# EAGLE board kickerv2 (EAGLE 9.6.2)
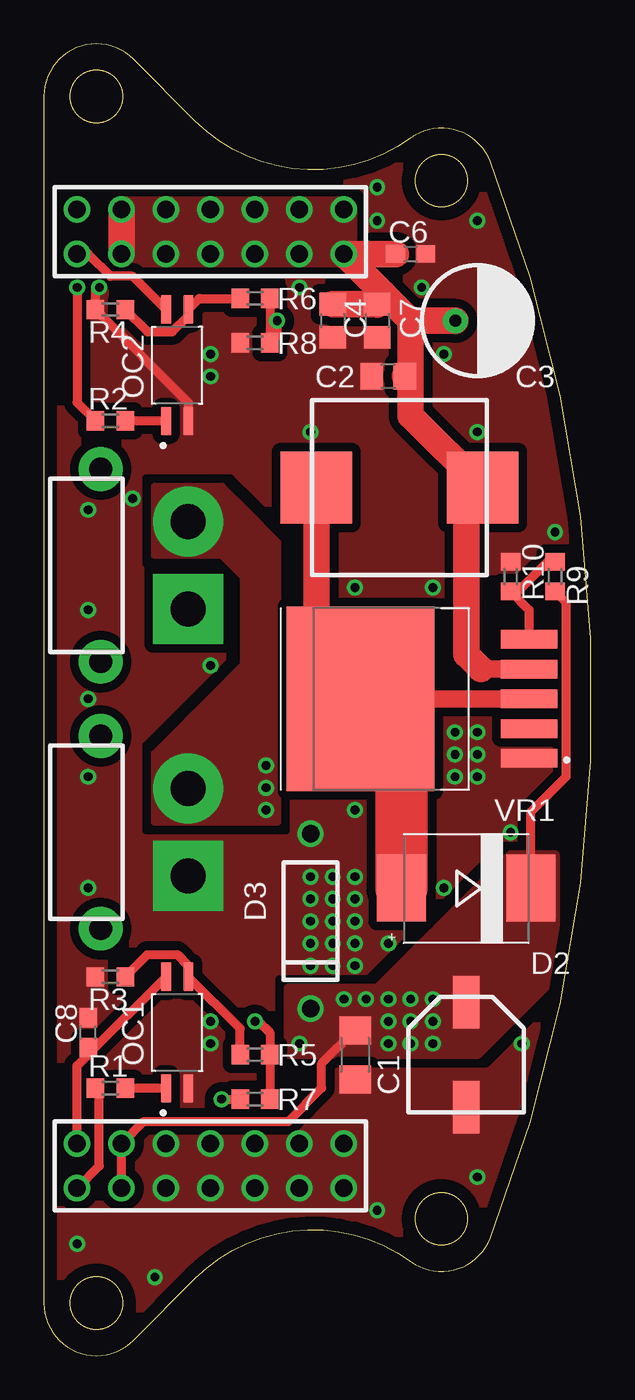
[diagram p0: board, top side]
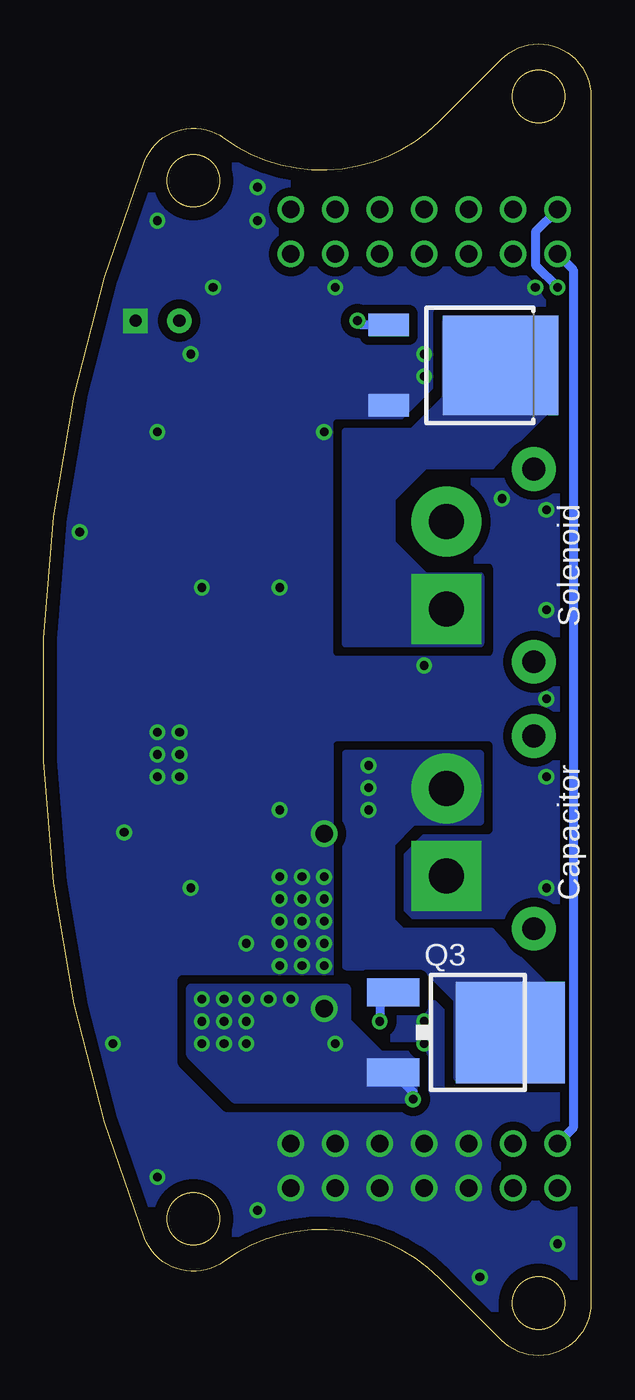
[diagram p1: board, bottom side, seen from below]

Size 31.26 x 74.91 mm. Coordinates in mm from the lower left corner, seen from the top.
Outline: 25.5,68.19 arc104 20.95,69.53
Outline: 20.95,69.53 arc-81 8.66,70.5
Outline: 5.12,74.03 arc135 0,71.91
Outline: 8.66,4.41 arc-81 20.95,5.39
Outline: 20.95,5.39 arc104 25.5,6.72
Outline: 8.66,4.41 5.12,0.88 arc-135 0,3 0,71.91
Outline: 8.66,4.41 arc-81 20.95,5.39
Outline: 20.95,5.39 arc104 25.5,6.72
Outline: 25.5,6.72 arc43 25.5,68.19
Outline: 25.5,68.19 arc104 20.95,69.53
Outline: 20.95,69.53 arc-81 8.66,70.5
Outline: 8.66,70.5 5.12,74.03
Outline: 5.12,74.03 arc135 0,71.91
Outline: circle at 22.71,7.82 radius 1.5
Outline: circle at 3,71.91 radius 1.5
Outline: circle at 22.71,67.1 radius 1.5
Outline: circle at 3,3 radius 1.5
Copper layers (1*16): Top 0.035mm / dielectric 1.5mm / Bottom 0.035mm
Design rules "default *": minimum track width 6mil, minimum drill 0.3mm, track to track 6mil, track to pad 6mil, pad to pad 6mil, via to via 6mil, smd to smd 6mil, copper to edge 30mil, drill to drill 6mil, minimum pad ring 10mil, minimum via ring 8mil, stop-mask expansion 4mil, vias tented up to drill 0mil, thermal gap 10mil

## Footprints (pad centres in the part's own frame; a part is rotated, then mirrored left to right if it is on the bottom)
C1206 = smd 1.6 x 1.8: 1 -1.4,0; 2 1.4,0
C0805 = smd 1.3 x 1.5: 1 -0.95,0; 2 0.95,0
MH5 = drill 0.7 pad 1.4: + 1.25,0 | drill 0.7 pad 1.4 square: - -1.25,0
VZ1H470ME077000CE0 = smd 1.5 x 3: + 0,3; - 0,-3
C0603 = smd 1.1 x 1: 1 -0.85,0; 2 0.85,0
DIOSC6959X240 = smd 2.8 x 3.8: A 3.7,0; C -3.7,0
UF2010 = drill 1: A 5,0; C -5,0
MDE1040-470M = smd 4.1 x 4.1: P$1 4.75,0; P$2 -4.75,0
SOIC127P700X230-4N = smd 1.64 x 0.59: A -3.185,0.635; C -3.185,-0.635; COL 3.185,0.635; EMI 3.185,-0.635
TO230P1040X230-3N = smd 5.67 x 6.59: D 0,1.2 | smd 1.28 x 2.3: G -2.3,-5.2; S 2.3,-5.2
DPACK = smd 5.8 x 6.2: D 0,2.38 | smd 1.6 x 3: G -2.28,-4.3; S 2.28,-4.3
R0603 = smd 1 x 1.1: 1 -0.85,0; 2 0.85,0
2*7 = drill 1: 1 -1.27,7.62; 2 1.27,7.62; 3 -1.27,5.08; 4 1.27,5.08; 5 -1.27,2.54; 6 1.27,2.54; 7 -1.27,0; 8 1.27,0; 9 -1.27,-2.54; 10 1.27,-2.54; 11 -1.27,-5.08; 12 1.27,-5.08; 13 -1.27,-7.62; 14 1.27,-7.62
DPAK170P1435X465-6N = smd 3.21 x 1.05: 1 -6.13,3.4; 2 -6.13,1.7; 3 -6.13,0; 4 -6.13,-1.7; 5 -6.13,-3.4 | smd 8.46 x 10.53: 6 3.5,0
XT30PW-F = drill 2 pad 4: + 0,-2.5 | drill 2 pad 4 square: - 0,2.5 | drill 1.3 pad 2.5: P$3 5,5.5; P$4 5,-5.5

## Placement (x,y rotation side)
C1  1uf  [C1206]  17.78,17.19 270 top
C2  22uf  [C0805]  19.68,55.92 180 top
C3  100uf  [MH5]  24.77,59.1 180 top
C4  22uf  [C0805]  16.51,59.1 270 top
C5  47uf  [VZ1H470ME077000CE0]  24.13,17.19 0 top
C6  0.1uf  [C0603]  20.95,62.91 0 top
C7  22uf  [C0805]  19.05,59.1 270 top
C8  0.1uf  [C0603]  2.54,18.46 90 top
D2  SS1060C  [DIOSC6959X240]  24.13,26.71 180 top
D3  UF2010  [UF2010]  15.24,24.81 90 top
L1  47uh  [MDE1040-470M]  20.32,49.57 0 top
OC1  TL293(GB)  [SOIC127P700X230-4N]  7.62,18.46 90 top
OC2  TL293(GB)  [SOIC127P700X230-4N]  7.62,56.56 90 top
Q2  NP52N06SLG  [TO230P1040X230-3N]  6.35,56.56 270 bottom
Q3  TJ60S04M3L  [DPACK]  6.99,18.46 270 bottom
R1  100  [R0603]  3.81,15.28 180 top
R2  100  [R0603]  3.81,53.38 0 top
R3  1k  [R0603]  3.81,21.63 0 top
R4  1k  [R0603]  3.81,59.73 180 top
R5  100  [R0603]  12.06,17.19 180 top
R6  100  [R0603]  12.06,60.37 180 top
R7  10k  [R0603]  12.06,14.65 0 top
R8  10k  [R0603]  12.06,57.83 0 top
R9  62k  [R0603]  29.21,44.49 270 top
R10  2k  [R0603]  26.67,44.49 270 top
U$2  27  [2*7]  9.53,10.84 270 top
U$3  27  [2*7]  9.53,64.18 270 top
VR1  XL6009  [DPAK170P1435X465-6N]  21.59,37.51 180 top
XT1  XT30PW-F  [XT30PW-F]  8.26,29.89 180 top
XT2  XT30PW-F  [XT30PW-F]  8.26,45.13 180 top

## Library data of the parts
C1 C2 C4 C6-C8 = rcl; SPICEPREFIX: C
C3 C5 = capacitor
D2 = diode; AVAILABILITY: In Stock; CHECK_PRICES: https://www.snapeda.com/parts/SK36/Diotec/view-part/?ref=eda; DESCRIPTION: Diode Schottky 60 V 3A Surface Mount SMC (DO-214AB); MF: Diotec Semiconductor; MP: SK36; PACKAGE: DO-214AB-2 Diotec; PRICE: None; PURCHASE-URL: https://www.snapeda.com/api/url_track_click_mouser/?unipart_id=6186978&manufacturer=Diotec Semiconductor&part_name=SK36&search_term=do-214a; SNAPEDA_LINK: https://www.snapeda.com/parts/SK36/Diotec/view-part/?ref=snap
D3 = diode
L1 = insuctor
OC1 OC2 = TLP293(GB)
Q2 = TO230P1040X230-3N
Q3 = P-MOSFET
R1-R10 = rcl; SPICEPREFIX: R
U$2 U$3 = pin_socket
VR1 = XL6009; AVAILABILITY: Not in stock; CHECK_PRICES: https://www.snapeda.com/parts/XL6009/XLSEMI/view-part/?ref=eda; DESCRIPTION: The XL6009 regulator is a wide input range, current mode, DC/DC converter which is capable of generating either positive or negative output voltages.; MF: XLSEMI; MP: XL6009; PACKAGE: TO-263-5L XLSEMI; PRICE: None; SNAPEDA_LINK: https://www.snapeda.com/parts/XL6009/XLSEMI/view-part/?ref=snap
XT1 XT2 = XT

## Nets
40V: C1.1 C5.+ D2.C D3.C Q3.S R7.1 R9.2 U$2.11 U$2.12
+5V: C8.1 OC1.COL OC2.COL U$2.13 U$3.14
GND: C1.2 C2.2 C3.- C4.2 C5.- C6.2 C7.2 C8.2 D3.A OC1.C OC2.C Q2.S R3.1 R4.2 R8.1 R10.1 U$2.1 U$2.2 U$2.3 U$2.4 U$2.5 U$2.6 U$2.7 U$2.8 U$2.9 U$2.10 VR1.1 XT1.-
N$1: Q3.D XT1.+ XT2.+
N$2: Q2.D XT2.-
N$3: OC1.EMI R3.2 R5.2
N$4: R9.1 R10.2 VR1.5
N$5: OC1.A R1.1
N$6: OC2.A R2.2
N$7: OC2.EMI R4.1 R6.2
N$10: D2.A L1.P$2 VR1.3 VR1.6
N$13: Q3.G R5.1 R7.2
N$14: Q2.G R6.1 R8.2
SIG1: R1.2 U$2.14
SIG2: R2.1 U$3.13
VCC: C2.1 C3.+ C4.1 C6.1 C7.1 L1.P$1 U$3.1 U$3.2 U$3.3 U$3.4 U$3.5 U$3.6 U$3.7 U$3.8 U$3.9 U$3.10 U$3.11 U$3.12 VR1.4

## Tracks (layer width: path | path; a pad name or v marks a point on that pad's centre or on a via)
40V  (via drill 0.5)
  Top 0.5: D2.C 27.83,31.05 29.84,33.06 29.84,43.01 R9.2 | U$2.12 U$2.11 5.71,13.38 13.97,13.38 15.88,15.28 15.88,16.68 C1.1 | v10.16,14.65 R7.1
  Bottom 0.5: Q3.S 10.16,15.05 v10.16,14.65
  other vias: 22.23,20.36 22.23,19.09 20.95,19.09 20.95,20.36 14.61,17.82 19.68,19.09 19.68,17.82 20.95,17.82 22.23,17.82 19.68,20.36 18.41,20.36 17.14,20.36
  pour Top (isolate 0.5, no thermals): 26.67,28.62 29.21,28.62 29.21,21.63 24.77,17.19 13.97,17.19 13.97,21 19.05,21
  pour Bottom (isolate 0.5, no thermals): 10.16,17.19 10.16,14.65 20.32,14.65 22.86,17.19 22.86,21 13.97,21 13.97,19.09 12.06,17.19
+5V
  Top 0.5: U$2.13 1.91,16.56 2.54,17.19 2.54,17.2 | OC2.COL 5.09,61.64 3.81,61.64 2.54,62.91 U$3.14 | OC1.COL 2.54,17.2 | C8.1 2.54,17.2
  Bottom 0.5: U$3.14 1.01,62.02 1.01,13 U$2.13
GND  (via drill 0.5)
  Top 0.5: OC2.C 8.26,54.44 R4.2 2.96,60.79 v3.17,61
  other vias: 1.91,6.39 6.35,4.49 19.05,8.3 24.77,10.2 9.53,19.09 9.53,17.82 14.61,61 9.53,55.92 9.53,57.19 19.05,66.72 24.77,64.81 19.05,64.81 29.21,47.03 22.23,43.86 17.78,43.86 23.5,35.6 24.77,35.6 22.86,57.19 21.59,61 24.77,52.75 26.67,29.89 22.86,26.71 2.54,26.71 2.54,33.06 9.53,39.41 2.54,48.3 2.54,42.59 17.78,31.16 19.68,23.54 27.3,17.82 2.54,37.51 5.08,48.94 23.5,34.33 24.77,34.33 24.77,33.06 23.5,33.06 15.24,22.27 15.24,52.75 16.51,22.27 17.78,22.27 17.78,23.54 16.51,23.54 15.24,23.54 15.24,24.81 16.51,24.81 17.78,24.81 17.78,26.08 16.51,26.08 15.24,26.08 15.24,27.35 16.51,27.35 17.78,27.35
  pour Top (isolate 0.5, rank 2, no thermals): -2.54,76.88 33.02,76.88 33.02,-3.13 -2.54,-3.13
  pour Bottom (isolate 0.5, rank 2, no thermals): -5.08,75.61 31.75,75.61 31.75,-5.67 -5.08,-5.67
N$1  (via drill 0.5)
  other vias: 12.7,31.16 12.7,32.43 12.7,33.7
  pour Bottom (isolate 0.5, no thermals): 2.54,15.92 2.54,21 5.71,24.17 10.79,24.17 11.43,24.81 11.43,29.25 10.16,30.52 6.35,30.52 6.35,34.33 13.97,34.33 13.97,22.27 9.53,22.27 7.62,20.36 7.62,15.92
  pour Top (isolate 0.5, no thermals): 6.35,49.57 6.35,45.76 10.16,45.76 11.43,44.49 11.43,39.41 6.35,34.33 6.35,30.52 13.34,30.52 13.34,46.4 11.43,48.3 10.16,49.57
N$2
  pour Bottom (isolate 0.5, no thermals): 2.54,59.1 2.54,54.02 5.71,50.84 9.53,50.84 11.43,48.94 11.43,46.4 9.53,44.49 6.35,44.49 6.35,40.68 13.97,40.68 13.97,52.75 10.16,52.75 8.26,54.65 8.26,59.1
N$3
  Top 0.5: R3.2 5.93,22.9 7.62,22.9 8.26,22.27 OC1.EMI 11.21,18.68 R5.2
N$4
  Top 0.5: VR1.5 27.72,42.59 R10.2 27.09,43.64 28.79,45.34 R9.1
N$5
  Top 0.5: R1.1 6.97,15.28 OC1.A
N$6
  Top 0.5: R2.2 6.97,53.38 OC2.A
N$7
  Top 0.5: R6.2 8.88,60.37 OC2.EMI 8.26,59.37 7.35,58.46 5.93,58.46 R4.1
N$10
  Top 1: VR1.3 VR1.6
  Top 1.5: L1.P$2 15.57,40.03 VR1.6
  Top 3: VR1.6 20.43,35.17 D2.A
N$13  (via drill 0.5)
  Top 0.5: v12.06,19.09 12.28,19.09 12.91,18.46 R5.1 R7.2
  Bottom 0.5: v12.06,19.09 12.06,20.24 11.57,20.74 Q3.G
N$14  (via drill 0.5)
  Top 0.5: R6.1 R8.2 13.34,58.25 v13.34,59.1
  Bottom 0.5: Q2.G 13.1,58.86 v13.34,59.1
SIG1
  Top 0.5: R1.2 3.17,15.07 3.17,10.84 U$2.14
SIG2  (via drill 0.5)
  Top 0.5: R2.1 1.91,54.44 v1.91,61
  Bottom 0.5: U$3.13 3.17,64.18 3.17,62.27 v1.91,61
VCC
  Top 1: 24.97,39.21 VR1.4
  Top 1.5: U$3.11 U$3.12 | 19.37,60.68 U$3.2 C6.1 | 19.37,60.68 20.95,59.1 | C3.+ 20.95,59.1 | 20.95,59.1 20.95,55.6 | 20.95,55.6 20.95,53.69 L1.P$1 24.13,48.63 24.13,40.05 24.97,39.21 | C2.1 20.95,55.6 | C4.1 C7.1 | 19.05,60.37 19.37,60.68
  Top 1.6: C7.1 19.05,60.37
  pour Top (isolate 0.5, no thermals): 4.45,65.45 4.45,62.91 17.14,62.91 17.14,65.45

## Text on the board
bPlace: Solenoid | Capacitor